# Altium PCB RS232-RS485-PC.PcbDoc
Units mm, origin at the board's own origin, x right, y up, seen from the top; angles counter-clockwise.
Board outline 57.5 x 35.2 mm, 2 copper layers (Top Layer, Bottom Layer); 27 components, 22 nets, 90 pads, 0 vias.
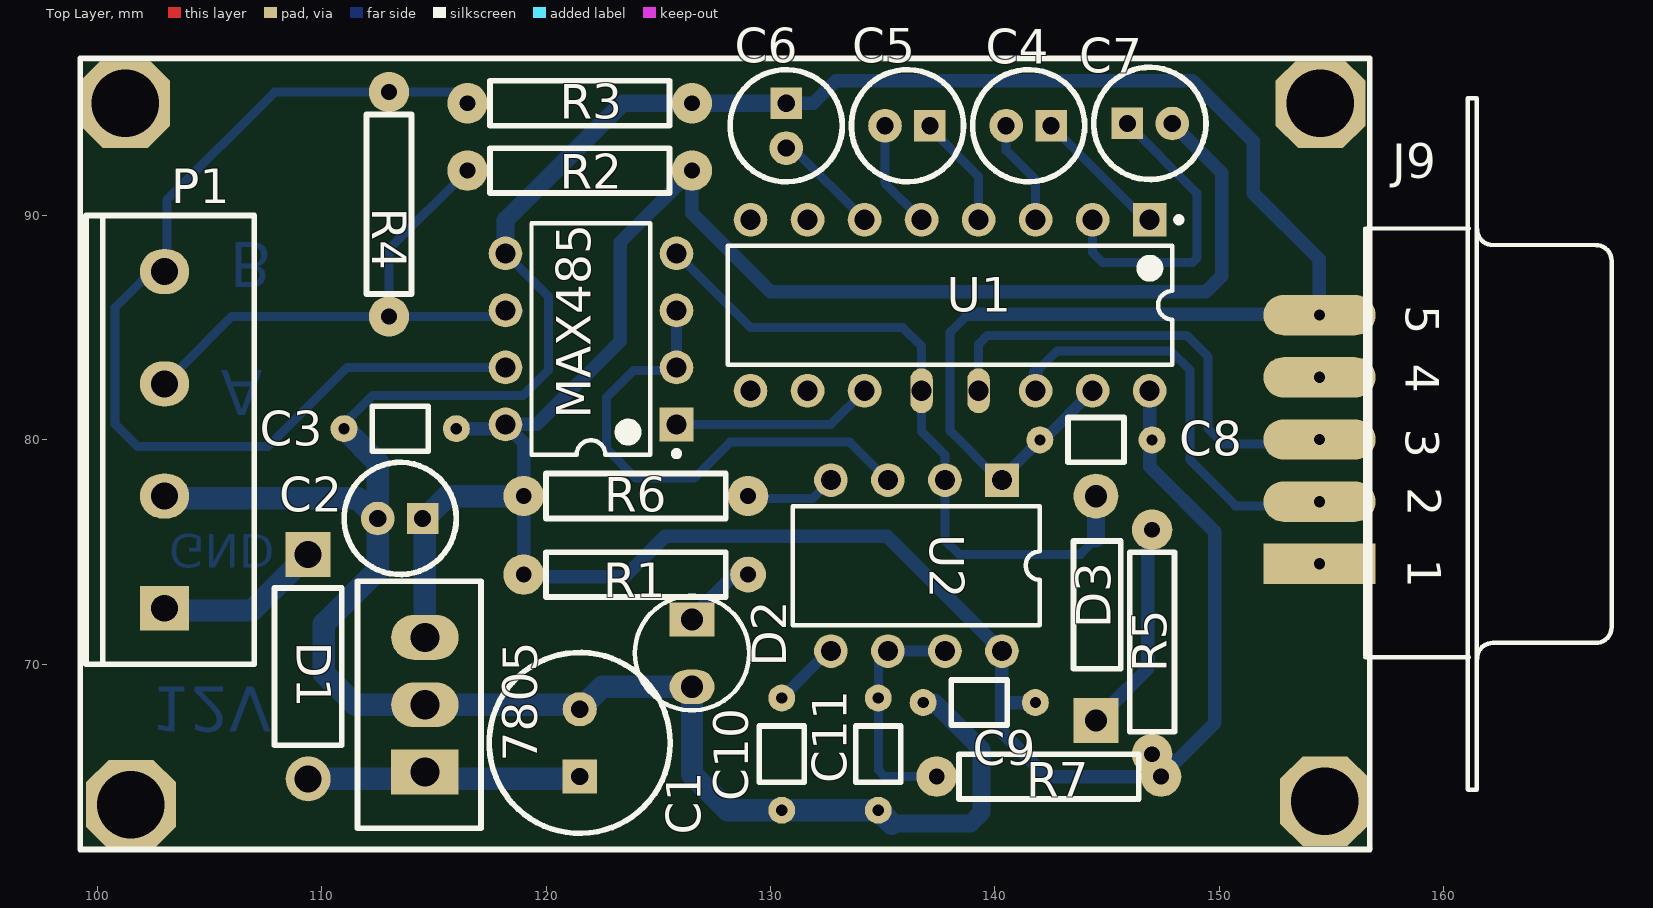
[diagram p0: Top Layer view]
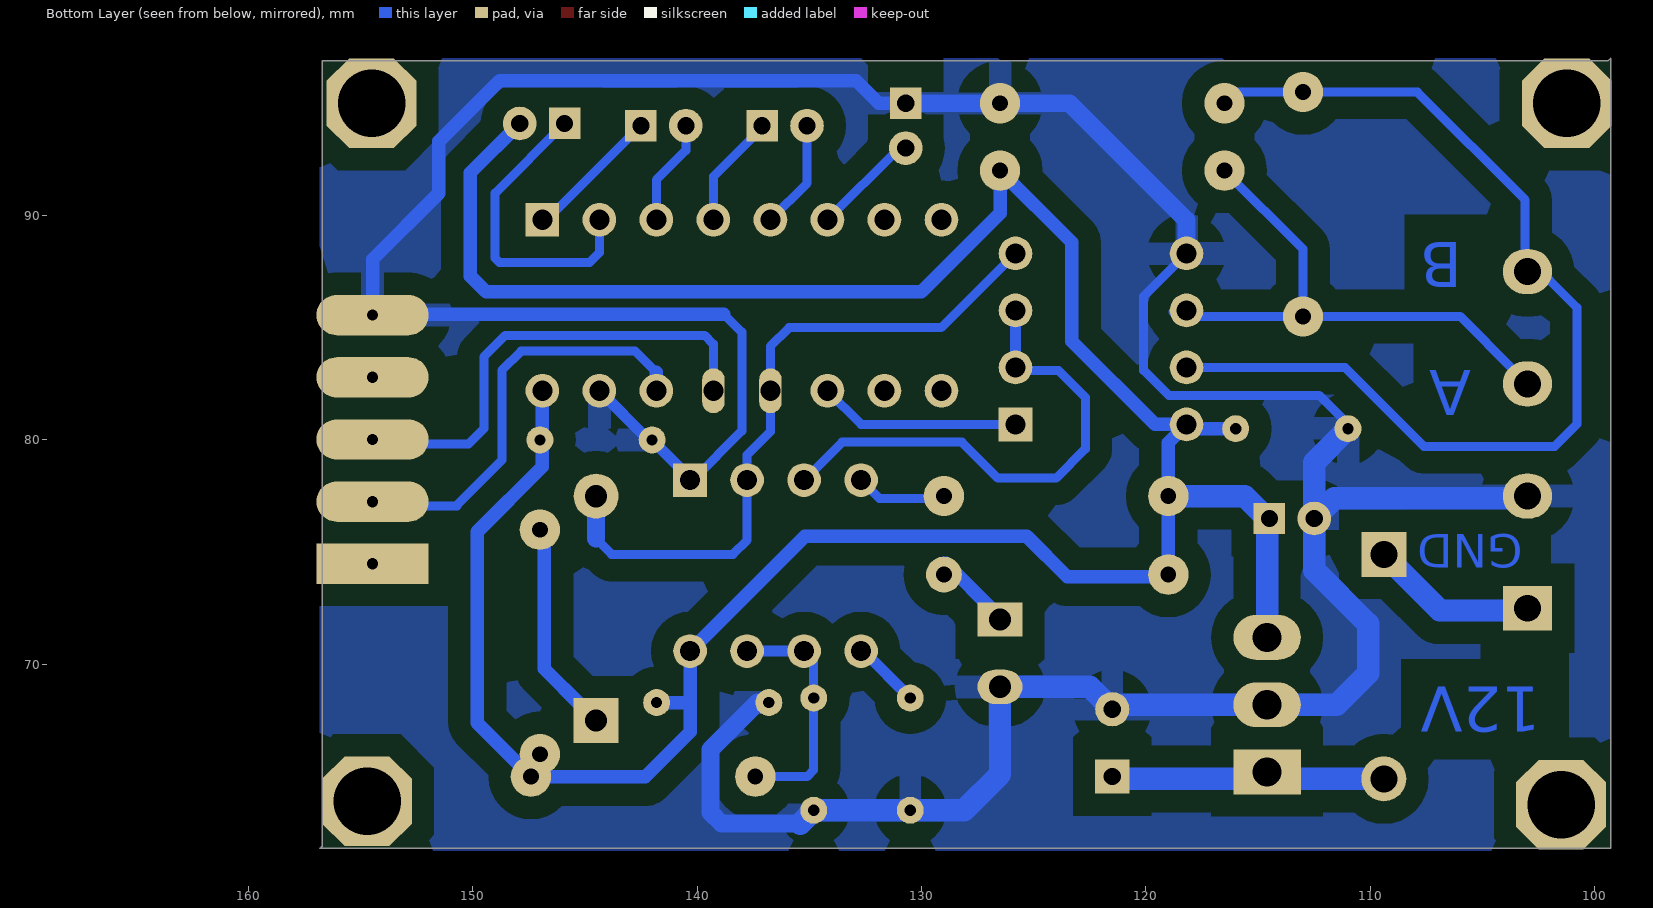
[diagram p1: Bottom Layer view, seen from below]

## Layer stack, top to bottom
Top Layer: signal copper 0.0356
Dielectric: dielectric 0.32, FR-4, Dk 4.8
Bottom Layer: signal copper 0.0356

## Board outline
99.3,97 99.4,96.9 156.7,96.9 156.7,61.9 156.8,61.8 99.3,61.8 99.3,97

## Design rules (kind name [scope] priority, off if disabled: settings)
Clearance [All] p1: gap=1
PlaneClearance [All] p1: clearance=0.8
PlaneConnect [All] p1: planeconnectstyle=Relief reliefexpansion=1 reliefentries=4 reliefconductorwidth=1 reliefairgap=0.8
PolygonConnect [All] p1: connectstyle=Relief reliefconductorwidth=1 reliefentries=4 polygonreliefangle="90 Angle"
RoutingVias [All] p1: holewidth=0.711 width=1.27 viastyle="Through Hole" minholewidth=0.711 minwidth=1.27 maxholewidth=0.711 maxwidth=1.27
SilkscreenOverComponentPads [All] p1: minsilkscreentomaskgap=0.254
SolderMaskExpansion [All] p1: expansion=1
Width [InNet('VCC')] p1: maxlimit=0.6 minlimit=0.5 preferedwidth=0.6
25 further rules are at their usual default settings.

## Components (designator, comment, footprint, x,y, rotation, side; value= is the part's Value field where it differs from the comment)
7805 "Volt Reg" 78xx_NO 114.6,67.7 r90 top
C1 "Cap Pol1" "tu 100uF/50v" 121.5,67 r90 top
C2 "Cap Pol1" "tu 10uF" 112.5,73.5 r180 top
C3 "Cap" C104_YELLOW 113.5,80.5 r0 top
C4 "Cap Pol1" "tu 10uF" 140.5,91 r180 top
C5 "Cap Pol1" "tu 10uF" 135.1,91 r180 top
C6 "Cap Pol1" "tu 10uF" 133.7,93 r270 top
C7 "Cap Pol1" "tu 10uF" 147.9,97.1 r0 top
C8 "Cap" C104_YELLOW 144.5,80 r0 top
C9 "Cap" C104_YELLOW 139.3,68.3 r0 top
C10 "Cap Pol1" C104_YELLOW 130.5,66 r270 top
C11 "Cap Pol1" C104_YELLOW 134.8,66 r270 top
D1 "Diode 1N4007" D_2A 109.4,74.9 r270 top
D2 "LED1" LED_3 126.5,71 r270 top
D3 "Diode 1N4007" D_1A 144.5,67.5 r90 top
J9 "D Connector 9" COM9_2 156.5,80 r270 top
MAX485 "MAX485CSA" PA8 122,84.5 r180 top
P1 "Header 4" HEADER4 103,82.5 r270 top
R1 "Res3" R_Nor#1 124,74 r180 top
R2 "560R" R_Nor#2 121.5,92 r0 top
R3 "560R" R_Nor#2 121.5,95 r180 top
R4 "120R" R_Nor#2 113,90.5 r90 top
R5 "4K7" R_Nor#2 147,71 r270 top
R6 "4K7" R_Nor#2 124,77.5 r0 top
R7 "120R" R_Nor#2 142.4,65 r180 top
U1 "MAX232ACPE" PE16A 138,86 r270 top
U2 "NE555N" DIP8 136.5,74.4 r180 top

## Footprints (in the part's own frame and the unit in brackets; to place one, negate y for a bottom-side part, rotate by r counter-clockwise, add the part's x,y. Pads: shape width x height; smd on the part's side, far side on the other; paste and mask are expansions set on the pad)
78xx_NO [mm]
  rect 2x3 hole 1.3: 1(-2.5,0)
  oval 2x3 hole 1.3: 2(0.5,0) 3(3.5,0)
  silkscreen extent -5,-2.5 6,3
C104_YELLOW [mm]
  round 1.2 hole 0.5: 1(-2.5,0) 2(2.5,0)
  silkscreen extent -1.25,-1 1.25,1
COM9_2 [mm] "COM"
  rect 1.8x5 hole 0.5: 1(5.52,-2.045)
  oval 1.8x5 hole 0.5: 2(2.75,-2.045) 3(-0.02,-2.045) 4(-2.79,-2.045) 5(-5.56,-2.045)
  silkscreen extent -15.22,0 15.58,10.97
D_1A [mm]
  rect 2x2 hole 1: 1(0,0)
  round 2 hole 1: 2(10,0)
  silkscreen extent 2.3,-1.1 8,1
D_2A [mm]
  rect 2x2 hole 1.2: 1(0,0)
  round 2 hole 1.2: 2(10,0)
  silkscreen extent 1.5,-1.5 8.5,1.5
DIP8 [mm] "DIP; 8 Leads; Row Spacing 7.62 mm; Pitch 2.54 mm"
  rect 1.5x1.5 hole 0.9: 1(-3.81,-3.81)
  round 1.5 hole 0.9: 2(-1.27,-3.81) 3(1.27,-3.81) 4(3.81,-3.81) 5(3.81,3.81) 6(1.27,3.81) 7(-1.27,3.81) 8(-3.81,3.81)
  silkscreen extent -5.5,-2.65 5.5,2.65
HEADER4 [mm]
  rect 2x2.2 hole 1.2: 1(10,0)
  oval 2x2.2 hole 1.2: 2(5,0) 3(0,0) 4(-5,0)
  silkscreen extent -7.5,-3.5 12.5,4, body extent -7.5,-3.5 12.5,4, height 10.1
LED_3 [mm]
  rect 1.524x2 hole 1: 1(-1,0)
  oval 1.524x2 hole 1: 2(2,0)
  silkscreen extent -2.05,-2.55 3.05,2.55
PA8 [mm] "DIP, 8-Leads, Row Spacing 7.62mm, Pitch 2.54mm, Body 9.38x7.24mm"
  rect 1.5x1.5 hole 0.9: 1(-3.81,3.81)
  round 1.5 hole 0.9: 2(-3.81,1.27) 3(-3.81,-1.27) 4(-3.81,-3.81) 5(3.81,-3.81) 6(3.81,-1.27) 7(3.81,1.27) 8(3.81,3.81)
  silkscreen extent -3.94,-5.15 2.65,5.23, body extent -3.6,-5.15 3.6,5.15, height 4.58
PE16A [mm] "DIP, 16-Leads, Row Spacing 7.62mm, Pitch 2.54mm, Body 19.18x6.99mm"
  rect 1.5x1.5 hole 0.9: 1(-3.81,8.89)
  round 1.5 hole 0.9: 2(-3.81,6.35) 3(-3.81,3.81) 4(-3.81,1.27) 5(-3.81,-1.27) 6(-3.81,-3.81) 7(-3.81,-6.35) 8(-3.81,-8.89) 9(3.81,-8.89) 10(3.81,-6.35) 11(3.81,-3.81) 14(3.81,3.81) 15(3.81,6.35) 16(3.81,8.89)
  oval 2x1 hole 0.9: 12(3.81,-1.27) 13(3.81,1.27)
  silkscreen extent -3.93,-9.9 2.65,10.32, body extent -3.3,-9.9 3.3,9.9, height 5.08
R_Nor#1 [mm]
  round 1.6 hole 0.7: 1(-5,0)
  round 1.8 hole 0.7: 2(5,0)
  silkscreen extent -4,-1 4,1
R_Nor#2 [mm]
  round 1.8 hole 0.7: 1(-5,0) 2(5,0)
  silkscreen extent -4,-1 4,1
"tu 10uF" [mm]
  rect 1.4x1.4 hole 0.762: 1(-2,-3)
  round 1.5 hole 0.762: 2(0,-3)
  silkscreen extent -3.5,-5.5 1.5,-0.5
"tu 100uF/50v" [mil]
  rect 60x60 hole 30: 1(-78.74,0)
  round 60 hole 30: 2(39.37,0)
  silkscreen extent -178,-159 139,159

## Part data
7805: "Voltage Regulator"
C1 C2 C4 C5 C6 C7 C10 C11: "Polarized Capacitor (Radial)"
C3 C8 C9: library part Ceramic, "Capcitor"
D1 D3: "1 Amp General Purpose Rectifier"
D2: "Typical RED GaAs LED"
J9: "Receptacle Assembly, 9 Position, Right Angle"
MAX485: "Low-Power, Slew-Rate-Limited RS-485/RS-422 Transceiver"
P1: "Header, 4-Pin"
R1: "Resistor"
R2 R3 R4 R5 R6 R7: library part Res
U1: "+5V Powered, Multi-Channel RS-232 Driver/Receiver"
U2: "General-Purpose Single Bipolar Timer"

## Free pads (board coordinates)
  oct 4x4 hole 3: 0(101.25,95) 1(101.5,63.75) 1(154.5,95) 1(154.7,63.9)

## Nets (pads, with @x,y where several pads share a name; then routed paths per layer and width w, separated by ;. In a path a pad name is that pad's centre, name@x,y a point inside that pad or via, vN(x,y) a via of type N, cw(c..) or ccw(c..) an arc to the next point about the centre after c; other vN are vias at no path point)
+12V: D1.1 P1.1 | length 7.4
  Bottom Layer w1: P1.1@103,72.4 106.9,72.4 D1.1
A: MAX485.6 P1.3 R2.1 R4.1 | length 25.8
  Bottom Layer w0.4: P1.3@102.3,82.4 103,83.1 103.6,83.1 106,85.5 110.5,85.5 R4.1 ; R2.1 113,88.5 R4.1 ; MAX485.6@118.8,85.7 118.6,85.5 R4.1
B: MAX485.7 P1.4 R3.2 R4.2 | length 46
  Bottom Layer w0.4: R3.2 116.5,95.3 116.3,95.5 107.9,95.5 103.1,90.7 103.1,88.2 100.8,85.9 100.8,80.7 101.8,79.7 107.6,79.7 111.13,83.23 MAX485.7
DI: D3.2 MAX485.4 U1.12 U2.2 | length 30.9
  Bottom Layer w0.4: MAX485.4 129.12,85 135.9,85 136.73,84.17 U1.12 136.73,80.37 137.77,79.33 U2.2 137.77,75.53 138.4,74.9 143.8,74.9 144.5,75.6
  Bottom Layer w0.8: 144.5,75.6 D3.2
EN: MAX485.2 MAX485.3 U2.3 | length 22.9
  Bottom Layer w0.4: MAX485.2 125.68,83.1 123.9,83.1 122.7,81.9 122.7,79.6 124,78.3 126.6,78.3 128.2,79.9 133.54,79.9 U2.3
  Bottom Layer w0.5: MAX485.2 MAX485.3
GND: 7805.2 C1.2 C2.2 C3.1 C6.1 C8.1 C9.1 C10.2 C11.2 D2.2 J9.5 MAX485.5 P1.2 R3.1 U1.15 U2.1 | length 156.3
  Bottom Layer w0.4: C3.1@110.9,80.6 112.28,81.98 118.98,81.98 120.1,83.1 120.1,86.4 MAX485.5 MAX485.5@117.88,88 ; 138.8,85.6 138,84.8 138,80.4 U2.1@140.2,78.2
  Bottom Layer w0.5: U2.1@140.2,78.2 C8.1 142.16,80 U1.15
  Bottom Layer w0.6: C6.1 131.9,95 132.9,96 148.8,96 151.5,93.3 151.5,91 154.455,88.045 J9.5 ; 138.8,85.6 152.615,85.6 J9.5@152.855,85.36
  Bottom Layer w0.8: MAX485.5 118.19,89.79 123.4,95 R3.1 C6.1 ; 135.4,62.9 138.9,62.9 139.4,63.4 139.4,66.2 C9.1@137.3,68.3
  Bottom Layer w1: P1.2@103,77.4 111.6,77.4 C2.2 ; C3.1 112.5,79 C2.2 ; C1.2@121.3,68.2 7805.2 111.5,68.2 110.1,69.6 110.1,71.8 112.5,74.2 C2.2 ; C1.2 122.5,69 D2.2 ; D2.2@126.5,68.7 D2.2 ; 135.4,62.9 C11.2 C10.2 128.1,63.5 126.5,65.1 D2.2
Net7805_1: 7805.1 C1.1 D1.2 | length 12
  Bottom Layer w1: D1.2 C1.1@121.4,64.9
NetC4_1: C4.1 U1.1 | length 6.1
  Bottom Layer w0.4: C4.1 146.69,89.81 U1.1
NetC4_2: C4.2 U1.3 | length 4.7
  Bottom Layer w0.4: C4.2 140.5,92.9 141.81,91.59 U1.3
NetC5_1: C5.1 U1.4 | length 5.1
  Bottom Layer w0.4: C5.1 137.1,93.9 139.27,91.73 U1.4
NetC5_2: C5.2 U1.5 | length 4.9
  Bottom Layer w0.4: C5.2 135.1,91.44 U1.5
NetC6_2: C6.2 U1.6 | length 4.8
  Bottom Layer w0.4: C6.2 131,93 U1.6
NetC7_1: C7.1 U1.2 | length 13.7
  Bottom Layer w0.4: U1.2 144.35,88.35 144.8,87.9 148.8,87.9 149,88.1 149,91 C7.1
NetC10_1: C10.1 U2.5 | length 3.1
  Bottom Layer w0.5: C10.1 U2.5@132.59,70.59
  Bottom Layer w1: U2.5@132.59,70.59 U2.5
NetC11_1: C11.1 R7.2 U2.6 U2.7 | length 10.1
  Bottom Layer w0.4: U2.6@134.8,70.16 134.8,65.3 135.1,65 R7.2
  Bottom Layer w0.5: U2.6 U2.7
NetD2_1: D2.1 R1.1 | length 3.2
  Bottom Layer w0.6: D2.1@126.7,72.3 128.9,74.5 R1.1@129,74.5
NetD3_1: D3.1 R5.1 | length 9.8
  Bottom Layer w0.6: D3.1@143.9,68.1 145.1,68.1 146.8,69.8 146.8,75.6 R5.1@146.5,75.9
NetR6_2: R6.2 U2.4 | length 4.2
  Bottom Layer w0.4: R6.2@129,77 129.4,77.4 131.88,77.4 U2.4
RO: MAX485.1 U1.11 | length 9
  Bottom Layer w0.4: MAX485.1 132.69,80.69 U1.11
RX: J9.2 U1.14 | length 17.5
  Bottom Layer w0.4: 141.81,83.01 142.76,83.96 147.84,83.96 148.7,83.1 148.7,79.1 150.75,77.05 ; 150.7,77.05 150.75,77.05 ; J9.2@152.855,77.05 150.75,77.05
  Bottom Layer w0.6: U1.14 141.81,83.01
TX: J9.3 U1.13 | length 19.7
  Bottom Layer w0.4: U1.13 139.27,84.27 139.66,84.66 148.54,84.66 149.5,83.7 149.5,80.5 150.18,79.82 J9.3@152.855,79.82
VCC: 7805.3 C2.1 C3.2 C7.2 C8.2 C9.2 MAX485.8 R1.2 R2.2 R5.2 R6.1 R7.1 U1.16 U2.8 | length 126.3
  Bottom Layer w0.6: C3.2 MAX485.8@118,80.5 ; U2.8@140.3,70.58 140.3,68.3 ; U2.8 135.2,75.7 125.3,75.7 123.5,73.9 119,73.9 R6.1 119,79.88 MAX485.8 119.59,80.69 123.3,84.4 123.3,88.8 R2.2 126.5,90.1 130,86.6 149.4,86.6 150.1,87.3 150.1,91.9 C7.2 ; C9.2 140.3,68.3 ; U1.16 146.89,78.81 149.8,75.9 149.8,67.4 R7.1 142.3,65 140.3,67 140.3,68.3
  Bottom Layer w1: 7805.3 114.6,76.5 115.6,77.5 R6.1
pads on no net: J9.1 J9.4 U1.7 U1.8 U1.9 U1.10

## Polygon pours and split planes (outlines as drawn)
GND on Bottom Layer "Bottom Layer-No Net" (solid, pour order 1000): 99.3,96.9 99.4,97 156.8,97 156.8,61.8 156.7,61.7 99.3,61.7 99.3,96.9

## Other copper
Bottom Layer:
  text "B" at 105.9,88.8 h2 r180
  text "A" at 105.5,83.1 h2 r180
  text "GND" at 103.2,75.8 h1.5 r180
  text "12V" at 102.4,69 h2 r180

## Silkscreen, mask and mechanical layers (free items; w line width, h text height)
Top Overlay:
  lines w0.254: 99.25,61.75 99.25,97 100,97 156.7,97 156.7,61.75 99.25,61.75

## Text inside footprints (layer, text, board x,y; h text height)
J9: Top Overlay "1" at 158.4,74.7 h1.5 r270; Top Overlay "5" at 158.3,86 h1.5 r270; Top Overlay "2" at 158.4,77.9 h1.5 r270; Top Overlay "3" at 158.3,80.5 h1.5 r270; Top Overlay "4" at 158.3,83.4 h1.5 r270